# Altium PCB bootleg-3.PcbDoc (part 2 of 2)
Units mm, origin at the board's own origin, x right, y up, seen from the top; angles counter-clockwise.
Board outline 284.8 x 94.3 mm, 2 copper layers (Component Side, Bottom Layer), stack 1.571 mm thick; 153 components, 101 nets, 724 pads, 53 vias.
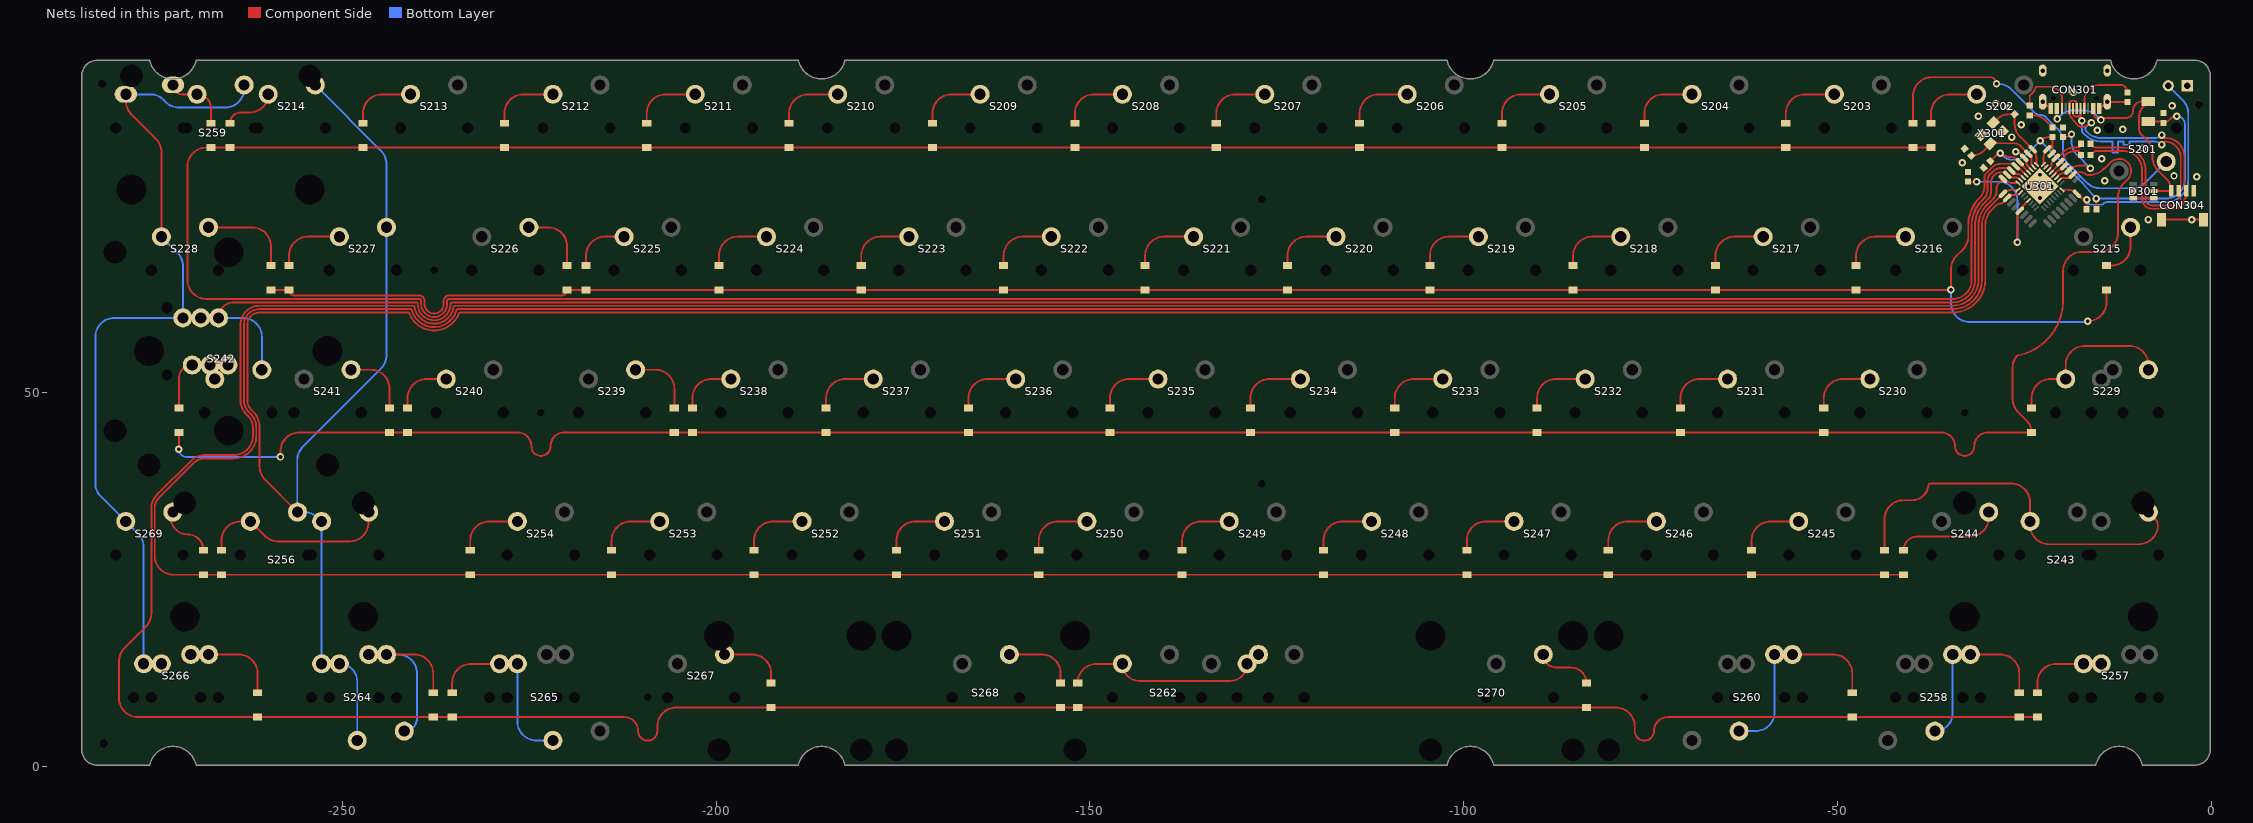
[diagram p2: the nets of this part, all layers, seen from the top]

## Via types
v1: diameter 1, hole 0.5, Component Side to Bottom Layer, tented both sides, 48 vias
v2: diameter 1, hole 0.5, Component Side to Bottom Layer, tented bottom, 5 vias

## Nets (pads, with @x,y where several pads share a name; then routed paths per layer and width w, separated by ;. In a path a pad name is that pad's centre, name@x,y a point inside that pad or via, vN(x,y) a via of type N, cw(c..) or ccw(c..) an arc to the next point about the centre after c; other vN are vias at no path point) (continued)
col14: S214.2 S227.2 S256.2 S264.2 U301.10 | length 379.4
  Component Side w0.254: -261.694,47.157 ccw(c-264.169,45.33) -261.996,47.507 -262.268,47.779 cw(c-261.112,48.931) -262.744,48.931 -262.744,59.09 cw(c-261.112,59.09) -262.432,60.05 cw(c-261.112,59.09) -261.112,60.722 -241.29,60.722 cw(c-241.289,60.468) -241.053,60.561 ccw(c-237.75,61.865) -240.674,59.85 ccw(c-237.75,61.865) -238.635,58.426 ccw(c-237.75,61.865) -235.455,59.155 ccw(c-237.75,61.865) -234.447,60.561 cw(c-234.211,60.467) -234.219,60.721 cw(c-234.172,59.309) -234.172,60.722 -34.563,60.722 ccw(c-34.563,65.078) -30.207,65.078 -30.207,72.357 cw(c-27.213,72.357) -29.331,74.473 -28.794,75.01 cw(c-28.067,74.282) -28.067,75.311 ccw(c-28.067,75.464) -27.959,75.356 -26.861,76.454 -26.035,76.454 ccw(c-26.035,77.021) -25.634,76.62 U301.10@-25.467,76.787 ; -261.694,47.156 cw(c-264.169,45.33) -261.093,45.33 -261.093,40.13 ccw(c-258.553,40.13) -260.349,38.334 S256.2@-256.03,34.015
  Bottom Layer w0.254: S214.2@-253.324,90.839 -244.869,82.384 cw(c-246.665,80.588) -244.125,80.588 S227.2@-244.125,72.115 -244.125,54.996 cw(c-246.665,54.996) -244.869,53.2 -255.313,42.756 ccw(c-253.517,40.96) -256.057,40.96 -256.057,34.015 S256.2@-256.03,34.015 -255.134,34.015 cw(c-255.134,31.475) -253.338,33.271 -252.832,32.765 -252.832,13.792 ccw(c-252.724,13.792) S264.2@-252.8,13.715 ; S264.2@-250.419,13.715 cw(c-250.419,11.334) -248.038,11.334 S264.2@-248.038,3.465
col15: S228.2 S242.1 S259.2 S266.2 S269.2 U301.7 | length 382.3
  Component Side w0.254: S259.2@-278.994,89.915 -278.994,89.038 ccw(c-276.454,89.038) -278.25,87.242 -274.981,83.973 cw(c-276.777,82.177) -274.237,82.177 S228.2@-274.237,70.865 ; S228.2@-274.266,70.807 S228.2@-273.627,71.445 ; S242.1@-266.599,59.995 cw(c-264.51,59.995) -264.51,62.084 -240.194,62.084 cw(c-240.193,61.83) -239.939,61.834 ccw(c-237.75,61.865) -235.561,61.834 cw(c-235.307,61.83) -235.306,62.084 -34.563,62.084 ccw(c-34.563,65.078) -31.569,65.078 -31.569,72.357 cw(c-27.213,72.357) -30.293,75.437 -29.802,75.928 ccw(c-30.709,76.835) -29.426,76.835 -29.426,78.129 cw(c-28.046,78.129) -29.023,79.104 ; -29.022,79.105 cw(c-28.085,78.167) -28.298,79.476 ; -28.298,79.493 U301.7@-27.642,79.493 ; U301.7@-27.362,79.248 U301.7@-27.27,79.156 -26.908,78.794 -26.162,78.794 cw(c-26.162,78.035) -25.625,78.572 U301.7@-25.467,78.413
  Bottom Layer w0.254: S269.2@-279.146,32.589 S269.2@-278.985,32.75 ; S259.2@-278.982,89.903 -278.994,89.891 S259.2@-278.994,89.915 -275.752,89.915 cw(c-275.752,87.375) -273.956,89.171 -273.667,88.882 ccw(c-271.871,90.678) -271.871,88.138 -265.709,88.138 ccw(c-265.709,90.678) -263.169,90.678 S259.2@-263.169,91.165 ; S266.2@-276.618,13.715 -276.618,29.331 ccw(c-279.158,29.331) -277.362,31.127 S269.2@-278.985,32.75 ; S228.2@-274.237,70.865 -272.105,68.733 cw(c-273.901,66.937) -271.361,66.937 S242.1@-271.361,59.995 -280.543,59.995 ccw(c-280.543,57.455) -283.083,57.455 -283.083,37.9 ccw(c-280.543,37.9) -282.339,36.104 S269.2@-279,32.765 S269.2@-278.985,32.75 ; S242.1@-266.599,59.995 -263.34,59.995 cw(c-263.34,57.455) -260.8,57.455 S242.1@-260.8,53.065
D_N: CON301.A7 CON301.B7 CON304.2 D301.4 R305.2 | length 50.7
  Component Side w0.254: CON301.A7@-18.45,88 cw(c-18.681,87.894) -18.427,87.894 -18.427,87.275 ccw(c-18.1,87.275) -18.1,86.948 -17.8,86.948 ccw(c-17.8,87.275) -17.473,87.275 -17.473,87.894 cw(c-17.219,87.894) CON301.B7@-17.45,88 -17.45,86.538 ccw(c-17.272,86.538) v1(-17.272,86.36) ; R305.2@-16.114,83.312 -15.732,82.93 ccw(c-15.367,83.294) -15.367,82.779 -11.76,82.779 cw(c-11.76,79.781) -8.763,79.781 -8.763,76.012 ; D301.4@-7.642,76.012 -8.763,76.012 ; v1(-6.604,83.185) -6.198,83.591 cw(c-6.198,81.438) -4.045,81.438 -4.045,77.682 cw(c-4.971,77.682) CON304.2@-4.316,77.027 -4.316,76.125 -4.045,75.854 -4.045,75.819 cw(c-4.807,75.819) -4.807,75.057 -7.874,75.057 cw(c-7.874,75.946) -8.763,75.946 -8.763,76.012
  Bottom Layer w0.254: v1(-17.272,86.36) -17.272,85.09 ccw(c-16.815,85.09) -17.138,84.767 -16.866,84.495 ccw(c-14.747,86.614) -14.747,83.617 -14.097,83.617 -13.208,83.617 -13.208,82.117 -12.446,82.117 -12.446,83.617 -11.684,83.617 -11.684,83.162 -10.922,83.162 -10.922,83.617 -9.017,83.617 -7.646,83.617 cw(c-7.646,82.143) -6.874,83.398 cw(c-7.646,82.143) v1(-6.604,83.185)
D_P: CON301.A6 CON301.B6 CON304.3 D301.3 R306.2 | length 50.7
  Component Side w0.254: CON301.A6@-17.95,88 cw(c-17.719,88.106) -17.973,88.106 -17.973,88.725 ccw(c-18.3,88.725) -18.3,89.052 -18.6,89.052 ccw(c-18.6,88.725) -18.927,88.725 -18.927,88.107 cw(c-19.181,88.106) CON301.B6@-18.95,88 -18.927,87.265 ccw(c-18.6,87.275) -18.899,87.143 -18.817,86.958 ccw(c-18.1,87.275) -18.699,86.769 -17.904,85.827 ccw(c-17.272,86.36) -17.111,85.549 ccw(c-17.272,86.36) -16.879,85.632 v1(-16.002,86.106) ; R306.2@-16.114,81.788 -15.732,82.17 cw(c-15.367,81.806) -15.367,82.321 -11.76,82.321 cw(c-11.76,79.781) -9.22,79.781 -9.22,76.012 ; D301.3@-10.392,76.012 -9.22,76.012 ; v1(-6.604,84.455) -6.198,84.049 -6.008,84.049 cw(c-6.008,81.628) -3.587,81.628 -3.587,77.682 ccw(c-2.661,77.682) CON304.3@-3.316,77.027 -3.316,76.125 -3.587,75.854 -3.587,75.819 cw(c-4.807,75.819) -4.807,74.6 -7.874,74.6 cw(c-7.874,75.946) -9.22,75.946 -9.22,76.012
  Bottom Layer w0.254: v1(-16.002,86.106) ccw(c-16.002,85.677) -16.305,85.98 -16.815,85.471 -16.815,85.09 -16.543,84.818 ccw(c-14.747,86.614) -14.747,84.074 -7.524,84.074 ccw(c-7.524,85.375) v1(-6.604,84.455)
D_PRE_N: R305.1 U301.30 | length 6.1
  Component Side w0.254: U301.30@-21.719,79.828 -21.553,79.994 ccw(c-22.077,80.518) -21.336,80.518 cw(c-20.541,80.518) -21.103,81.08 U301.30@-20.765,81.419 ccw(c-20.765,82.004) -20.351,81.59 -19.691,82.25 cw(c-18.415,80.974) -18.415,82.779 -17.768,82.779 ccw(c-17.768,83.005) -17.541,83.005 cw(c-17.107,83.005) R305.1@-17.414,83.312
D_PRE_P: R306.1 U301.29 | length 5.6
  Component Side w0.254: U301.29@-21.366,79.474 -20.349,80.491 ccw(c-20.711,80.853) U301.29@-20.199,80.853 -19.786,81.266 ccw(c-20.199,81.68) -19.614,81.68 -19.501,81.793 cw(c-18.226,80.517) -18.226,82.321 -17.768,82.321 cw(c-17.768,82.095) -17.541,82.095 ccw(c-17.107,82.095) R306.1@-17.414,81.788
GND: C301.1 C302.1 C303.1 C304.1 C305.1 C306.1 CON301.A1B12 CON301.B1A12 CON301.S1 CON302.1 CON304.4 CON304.5 D301.2 R302.2 R303.2 R304.2 U301.3 U301.28 X301.2 X301.4 | length 23.3
  Component Side w0.254: C302.1@-30.432,79.778 C302.1@-30.432,80.058 ; v1(-26.141,82.232) -25.812,82.164 cw(c-25.863,81.915) -25.684,82.095 U301.3@-25.007,81.419 -25.007,81.139 -24.671,81.139 -24.671,80.702 ccw(c-24.051,80.702) -24.49,80.264 ; -24.489,80.264 U301.3@-24.053,79.828 ; R303.2@-24.257,87.107 -23.882,87.107 cw(c-23.882,84.567) -22.086,86.363 C303.1@-21.209,85.486 ; v2(-22.886,77.6) -22.533,77.6 U301.28@-21.012,79.121 -19.845,80.287 U301.28@-19.633,80.287 ; CON301.S1@-22.52,88.915 CON301.B1A12@-21.45,88 ; CON301.A1B12@-14.95,88 CON301.S1@-13.88,88.915 ccw(c-13.85,88.915) -13.85,88.885 R304.2@-11.176,88.885 ; CON304.5@-6.616,73.152 CON304.5@-1.016,73.152
  Bottom Layer w0.254: CON301.S1@-22.52,89.915 CON301.S1@-22.398,89.793 ; CON301.S1@-13.88,89.793 CON301.S1@-13.88,89.915
  other v1: -8.382,73.152 -2.569,73.138 -2.54,75.057 -14.224,78.359 -1.905,78.867 -4.953,78.994 -33.274,80.772 -14.605,81.28 -9.144,82.677 -26.67,84.201 -15.24,85.09 -11.811,85.217 -25.4,85.852 -31.115,86.995 -5.207,88.392 -28.829,88.646 -18.415,90.17
  other v2: -22.886,76.045 -24.442,77.6 -21.33,77.6 -22.886,79.156
NetC301_2: C301.2 U301.27 | length 12.1
  Component Side w0.254: U301.27@-20.659,78.767 -20.276,79.15 cw(c-19.732,78.607) -19.732,79.375 -19.414,79.375 U301.27@-19.068,79.722 cw(c-17.452,78.105) -17.452,80.391 -17.049,80.391 cw(c-17.049,79.09) v1(-16.129,80.01) ; C301.2@-19.812,84.186 -19.498,84.186 ccw(c-19.498,85.538) v1@-18.542,84.582
  Bottom Layer w0.254: v1(-18.669,84.582) -18.669,83.602 ccw(c-16.129,83.602) -17.925,81.806 v1(-16.129,80.01)
NetC305_2: C305.2 U301.2 X301.3 | length 10.8
  Component Side w0.254: C305.2@-32.052,81.709 ccw(c-32.052,84.046) -30.4,82.394 -29.428,83.366 -26.437,83.366 cw(c-26.437,81.882) -25.388,82.931 U301.2@-24.442,81.984 -24.01,81.552 -24.01,80.492 U301.2@-23.699,80.181
NetC306_2: C306.2 U301.1 X301.1 | length 11
  Component Side w0.254: X301.1@-29.16,86.088 -28.743,86.505 cw(c-26.947,84.709) -26.947,87.249 C306.2@-26.289,87.249 -26.289,86.015 ccw(c-23.749,86.015) -25.545,84.219 U301.1@-23.876,82.55 cw(c-25.156,81.27) -23.346,81.27 U301.1@-23.346,80.535
NetCON301_A5: CON301.A5 R304.1 | length 8.6
  Component Side w0.254: CON301.A5@-16.95,88 -16.95,89.095 cw(c-14.859,89.095) -14.859,91.186 -12.177,91.186 cw(c-12.177,90.185) R304.1@-11.176,90.185
NetCON301_B5: CON301.B5 R303.1 | length 8.5
  Component Side w0.254: R303.1@-24.257,88.407 -24.257,89.639 cw(c-24.003,89.639) -24.147,89.848 ccw(c-25.05,91.165) -23.523,90.697 ccw(c-25.05,91.165) -23.509,90.746 cw(c-23.264,90.679) -23.288,90.932 -21.601,90.932 cw(c-21.601,89.281) -19.95,89.281 CON301.B5@-19.95,88
NetD201_1: D201.1 S201.1 | length 48.7
  Component Side w0.254: D201.1@-39.878,86.05 -39.878,89.662 cw(c-37.338,89.662) -37.338,92.202 -29.591,92.202 cw(c-29.591,91.313) v1(-28.702,91.313)
  Bottom Layer w0.254: v1(-28.702,91.313) -28.509,91.313 cw(c-28.509,88.773) -26.713,90.569 -23.642,87.499 ccw(c-22.733,88.408) -22.733,87.122 cw(c-22.733,86.202) -22.083,86.853 -20.556,85.326 cw(c-22.352,83.53) -19.812,83.53 -19.812,82.339 ccw(c-17.272,82.339) -19.068,80.543 -16.612,78.087 ccw(c-14.816,79.883) -14.816,77.343 -10.624,77.343 ccw(c-10.624,79.883) -8.828,78.087 S201.1@-6,80.915 S201.1@-6.679,80.915
NetD202_1: D202.1 S202.1 | length 8.9
  Component Side w0.254: D202.1@-37.465,86.05 -37.465,87.375 cw(c-34.925,87.375) -34.925,89.915 S202.1@-31.35,89.915
NetD203_1: D203.1 S203.1 | length 9.3
  Component Side w0.254: D203.1@-56.896,86.05 -56.896,87.375 cw(c-54.356,87.375) -54.356,89.915 S203.1@-50.4,89.915
NetD204_1: D204.1 S204.1 | length 9.1
  Component Side w0.254: D204.1@-75.819,86.05 -75.819,87.375 cw(c-73.279,87.375) -73.279,89.915 S204.1@-69.45,89.915
NetD205_1: D205.1 S205.1 | length 9.1
  Component Side w0.254: D205.1@-94.869,86.05 -94.869,87.375 cw(c-92.329,87.375) -92.329,89.915 S205.1@-88.5,89.915
NetD206_1: D206.1 S206.1 | length 9.1
  Component Side w0.254: D206.1@-113.919,86.05 -113.919,87.375 cw(c-111.379,87.375) -111.379,89.915 S206.1@-107.55,89.915
NetD207_1: D207.1 S207.1 | length 9.3
  Component Side w0.254: D207.1@-133.096,86.05 -133.096,87.375 cw(c-130.556,87.375) -130.556,89.915 S207.1@-126.6,89.915
NetD208_1: D208.1 S208.1 | length 9.1
  Component Side w0.254: D208.1@-152.019,86.05 -152.019,87.375 cw(c-149.479,87.375) -149.479,89.915 S208.1@-145.65,89.915
NetD209_1: D209.1 S209.1 | length 9.1
  Component Side w0.254: D209.1@-171.069,86.05 -171.069,87.375 cw(c-168.529,87.375) -168.529,89.915 S209.1@-164.7,89.915
NetD210_1: D210.1 S210.1 | length 9.3
  Component Side w0.254: D210.1@-190.246,86.05 -190.246,87.375 cw(c-187.706,87.375) -187.706,89.915 S210.1@-183.75,89.915
NetD211_1: D211.1 S211.1 | length 9.3
  Component Side w0.254: D211.1@-209.296,86.05 -209.296,87.375 cw(c-206.756,87.375) -206.756,89.915 S211.1@-202.8,89.915
NetD212_1: D212.1 S212.1 | length 9.3
  Component Side w0.254: D212.1@-228.346,86.05 -228.346,87.375 cw(c-225.806,87.375) -225.806,89.915 S212.1@-221.85,89.915
NetD213_1: D213.1 S213.1 | length 9.1
  Component Side w0.254: D213.1@-247.269,86.05 -247.269,87.375 cw(c-244.729,87.375) -244.729,89.915 S213.1@-240.9,89.915
NetD214_1: D214.1 S214.1 | length 7.3
  Component Side w0.254: D214.1@-265.049,86.05 cw(c-263.596,86.05) -263.596,87.503 -262.362,87.503 ccw(c-262.362,89.915) S214.1@-259.95,89.915
NetD215_1: D215.1 S215.1 | length 7.2
  Component Side w0.254: D215.1@-13.97,67 -13.303,67 ccw(c-13.303,69.54) -10.763,69.54 S215.1@-10.763,72.115
NetD216_1: D216.1 S216.1 | length 10
  Component Side w0.254: D216.1@-47.498,67 -47.498,68.325 cw(c-44.958,68.325) -44.958,70.865 S216.1@-40.875,70.865 ; S216.1@-40.875,71.445 S216.1@-40.265,71.445
NetD217_1: D217.1 S217.1 | length 9.8
  Component Side w0.254: D217.1@-66.294,67 -66.294,68.325 cw(c-63.754,68.325) -63.754,70.865 S217.1@-59.925,70.865 ; S217.1@-59.925,71.445 S217.1@-59.315,71.445
NetD218_1: D218.1 S218.1 | length 9.8
  Component Side w0.254: D218.1@-85.344,67 -85.344,68.325 cw(c-82.804,68.325) -82.804,70.865 S218.1@-78.975,70.865 ; S218.1@-78.975,71.445 S218.1@-78.365,71.445
NetD219_1: D219.1 S219.1 | length 9.9
  Component Side w0.254: D219.1@-104.521,67 -104.521,68.325 cw(c-101.981,68.325) -101.981,70.865 S219.1@-98.025,70.865 ; S219.1@-98.025,71.445 S219.1@-97.415,71.445
NetD220_1: D220.1 S220.1 | length 9.3
  Component Side w0.254: D220.1@-123.571,67 -123.571,68.325 cw(c-121.031,68.325) -121.031,70.865 S220.1@-117.075,70.865
NetD221_1: D221.1 S221.1 | length 9.9
  Component Side w0.254: D221.1@-142.621,67 -142.621,68.325 cw(c-140.081,68.325) -140.081,70.865 S221.1@-136.125,70.865 ; S221.1@-136.125,71.445 S221.1@-135.515,71.445
NetD222_1: D222.1 S222.1 | length 9.1
  Component Side w0.254: D222.1@-161.544,67 -161.544,68.325 cw(c-159.004,68.325) -159.004,70.865 S222.1@-155.175,70.865
NetD223_1: D223.1 S223.1 | length 9.1
  Component Side w0.254: D223.1@-180.594,67 -180.594,68.325 cw(c-178.054,68.325) -178.054,70.865 S223.1@-174.225,70.865
NetD224_1: D224.1 S224.1 | length 9.1
  Component Side w0.254: D224.1@-199.644,67 -199.644,68.325 cw(c-197.104,68.325) -197.104,70.865 S224.1@-193.275,70.865
NetD225_1: D225.1 S225.1 | length 7.9
  Component Side w0.254: D225.1@-217.424,67 -217.424,68.325 cw(c-214.884,68.325) -214.884,70.865 S225.1@-212.325,70.865
NetD226_1: D226.1 S226.1 | length 9.1
  Component Side w0.254: S226.1@-225.075,72.115 -222.504,72.115 cw(c-222.504,69.575) -219.964,69.575 D226.1@-219.964,67
NetD227_1: D227.1 S227.1 | length 9.5
  Component Side w0.254: D227.1@-257.175,67 -257.175,68.325 cw(c-254.635,68.325) -254.635,70.865 S227.1@-250.425,70.865
NetD228_1: D228.1 S228.1 | length 12.4
  Component Side w0.254: S228.1@-267.938,72.115 -262.128,72.115 cw(c-262.128,69.575) -259.588,69.575 D228.1@-259.588,67
NetD229_1: D229.1 S229.1 | length 28.2
  Component Side w0.254: D229.1@-24.003,47.95 -24.003,49.275 ; S229.1@-19.444,51.815 S229.1@-20.153,51.815 ; S229.1@-8.381,53.065 -8.381,53.721 ccw(c-10.921,53.721) -10.921,56.261 -16.904,56.261 ccw(c-16.904,53.721) -19.444,53.721 -19.444,52.395 -19.573,52.395 S229.1@-20.153,51.815 ; -24.003,49.275 cw(c-21.463,49.275) -21.463,51.815 ; -24.003,49.275 cw(c-21.463,49.275) -21.463,51.815 ; -21.463,51.815 S229.1@-20.153,51.815
NetD230_1: D230.1 S230.1 | length 9
  Component Side w0.254: D230.1@-51.816,47.95 -51.816,49.275 cw(c-49.276,49.275) -49.276,51.815 S230.1@-45.637,51.815
NetD231_1: D231.1 S231.1 | length 9.1
  Component Side w0.254: D231.1@-70.993,47.95 -70.993,49.275 cw(c-68.453,49.275) -68.453,51.815 S231.1@-64.687,51.815
NetD232_1: D232.1 S232.1 | length 9.2
  Component Side w0.254: D232.1@-90.17,47.95 -90.17,49.275 cw(c-87.63,49.275) -87.63,51.815 S232.1@-83.737,51.815
NetD233_1: D233.1 S233.1 | length 9.2
  Component Side w0.254: D233.1@-109.22,47.95 -109.22,49.275 cw(c-106.68,49.275) -106.68,51.815 S233.1@-102.787,51.815
NetD234_1: D234.1 S234.1 | length 10.3
  Component Side w0.254: D234.1@-128.524,47.95 -128.524,49.275 cw(c-125.984,49.275) -125.984,51.815 S234.1@-121.837,51.815
  Bottom Layer w0.254: S234.1@-121.793,51.83 S234.1@-121.227,52.395
NetD235_1: D235.1 S235.1 | length 9.2
  Component Side w0.254: D235.1@-147.32,47.95 -147.32,49.275 cw(c-144.78,49.275) -144.78,51.815 S235.1@-140.887,51.815
NetD236_1: D236.1 S236.1 | length 9.1
  Component Side w0.254: D236.1@-166.243,47.95 -166.243,49.275 cw(c-163.703,49.275) -163.703,51.815 S236.1@-159.937,51.815
NetD237_1: D237.1 S237.1 | length 9.1
  Component Side w0.254: D237.1@-185.293,47.95 -185.293,49.275 cw(c-182.753,49.275) -182.753,51.815 S237.1@-178.987,51.815
NetD238_1: D238.1 S238.1 | length 7.9
  Component Side w0.254: D238.1@-203.2,47.95 -203.2,49.275 cw(c-200.66,49.275) -200.66,51.815 S238.1@-198.037,51.815
NetD239_1: D239.1 S239.1 | length 9.2
  Component Side w0.254: S239.1@-210.788,53.065 -208.153,53.065 cw(c-208.153,50.525) -205.613,50.525 D239.1@-205.613,47.95
NetD240_1: D240.1 S240.1 | length 7.9
  Component Side w0.254: D240.1@-241.3,47.95 -241.3,49.275 cw(c-238.76,49.275) -238.76,51.815 S240.1@-236.137,51.815
NetD241_1: D241.1 S241.1 | length 9.2
  Component Side w0.254: S241.1@-248.862,53.065 -246.253,53.065 cw(c-246.253,50.525) -243.713,50.525 D241.1@-243.713,47.95
NetD242_1: D242.1 S242.2 | length 6.8
  Component Side w0.254: D242.1@-271.907,47.95 -271.907,51.899 cw(c-270.111,51.899) S242.2@-270.111,53.695
NetD243_1: D243.1 S243.1 | length 52.7
  Component Side w0.254: D243.1@-43.688,28.9 -43.688,33.061 cw(c-41.148,33.061) -41.148,35.601 -40,35.601 ccw(c-40,37.79) -37.82,37.595 cw(c-37.567,37.573) -37.566,37.827 -34.414,37.827 cw(c-34.163,36.195) -34.163,37.846 -26.746,37.846 cw(c-26.746,35.306) -24.206,35.306 S243.1@-24.206,32.765 -24.206,32.258 ccw(c-21.666,32.258) -21.666,29.718 -9.652,29.718 ccw(c-9.652,32.258) -7.112,32.258 ccw(c-8.253,32.258) -8.253,33.399 S243.1@-8.381,33.399
NetD244_1: D244.1 S244.1 | length 14.2
  Component Side w0.254: D244.1@-41.148,28.9 cw(c-39.314,28.9) -41.051,29.49 cw(c-39.314,28.9) -39.314,30.734 -32.283,30.734 ccw(c-32.283,33.274) -29.743,33.274 S244.1@-29.743,33.528
NetD245_1: D245.1 S245.1 | length 9.1
  Component Side w0.254: D245.1@-61.468,28.9 -61.468,30.225 cw(c-58.928,30.225) -58.928,32.765 S245.1@-55.162,32.765
NetD246_1: D246.1 S246.1 | length 9.3
  Component Side w0.254: D246.1@-80.645,28.9 -80.645,30.225 cw(c-78.105,30.225) -78.105,32.765 S246.1@-74.212,32.765 ; S246.1@-74.295,32.652 S246.1@-74.197,32.75
NetD247_1: D247.1 S247.1 | length 9.1
  Component Side w0.254: D247.1@-99.568,28.9 -99.568,30.225 cw(c-97.028,30.225) -97.028,32.765 S247.1@-93.262,32.765
NetD248_1: D248.1 S248.1 | length 9.2
  Component Side w0.254: D248.1@-118.745,28.9 -118.745,30.225 cw(c-116.205,30.225) -116.205,32.765 S248.1@-112.312,32.765
NetD249_1: D249.1 S249.1 | length 9.1
  Component Side w0.254: D249.1@-137.668,28.9 -137.668,30.225 cw(c-135.128,30.225) -135.128,32.765 S249.1@-131.362,32.765
NetD250_1: D250.1 S250.1 | length 9.2
  Component Side w0.254: D250.1@-156.845,28.9 -156.845,30.225 cw(c-154.305,30.225) -154.305,32.765 S250.1@-150.412,32.765
NetD251_1: D251.1 S251.1 | length 9.2
  Component Side w0.254: D251.1@-175.895,28.9 -175.895,30.225 cw(c-173.355,30.225) -173.355,32.765 S251.1@-169.462,32.765
NetD252_1: D252.1 S252.1 | length 9.2
  Component Side w0.254: D252.1@-194.945,28.9 -194.945,30.225 cw(c-192.405,30.225) -192.405,32.765 S252.1@-188.512,32.765
NetD253_1: D253.1 S253.1 | length 9.2
  Component Side w0.254: D253.1@-213.995,28.9 -213.995,30.225 cw(c-211.455,30.225) -211.455,32.765 S253.1@-207.562,32.765
NetD254_1: D254.1 S254.1 | length 9.1
  Component Side w0.254: D254.1@-232.918,28.9 -232.918,30.225 cw(c-230.378,30.225) -230.378,32.765 S254.1@-226.612,32.765
NetD256_1: D256.1 S256.1 | length 25.6
  Component Side w0.254: D256.1@-266.192,28.9 -266.192,30.225 cw(c-263.652,30.225) -263.652,32.765 -262.357,32.765 -262.115,32.523 -260.435,30.843 ccw(c-258.639,32.639) -258.639,30.099 -249.072,30.099 ccw(c-249.072,32.639) -246.532,32.639 S256.1@-246.532,33.399
NetD257_1: D257.1 S257.2 | length 9
  Component Side w0.254: D257.1@-23.241,9.85 -23.241,11.175 cw(c-20.701,11.175) -20.701,13.715 S257.2@-17.062,13.715
NetD258_1: D258.1 S258.1 | length 22.2
  Component Side w0.254: S258.1@-32.188,14.965 -28.194,14.965 cw(c-28.194,12.425) -25.654,12.425 D258.1@-25.654,9.85
  Bottom Layer w0.254: S258.1@-36.95,4.715 ccw(c-36.95,7.096) -34.569,7.096 S258.1@-34.569,14.965
NetD259_1: D259.1 S259.1 | length 8.9
  Component Side w0.254: S259.1@-272.694,91.165 ccw(c-271.444,91.165) -271.444,89.915 S259.1@-269.469,89.915 cw(c-269.469,88.035) -267.589,88.035 D259.1@-267.589,86.05
NetD260_1: D260.1 S260.1 | length 28.5
  Component Side w0.254: S260.1@-58.526,14.965 S260.1@-58.387,14.965 S260.1@-56.006,14.965 -50.546,14.965 cw(c-50.546,12.425) -48.006,12.425 D260.1@-48.006,9.85
  Bottom Layer w0.254: S260.1@-63.15,4.715 -60.927,4.715 ccw(c-60.927,7.255) -58.387,7.255 S260.1@-58.387,14.965
NetD262_1: D262.1 S262.2 | length 26.8
  Component Side w0.254: D262.1@-151.638,11.135 -151.638,11.175 cw(c-149.098,11.175) -149.098,13.715 S262.2@-145.649,13.715 ccw(c-143.364,13.715) -143.364,11.43 -131.258,11.43 ccw(c-131.258,13.715) S262.2@-128.973,13.715
NetD264_1: D264.1 S264.1 | length 24.5
  Component Side w0.254: S264.1@-244.119,14.965 -240.411,14.965 cw(c-240.411,12.425) -237.871,12.425 D264.1@-237.871,9.85
  Bottom Layer w0.254: S264.1@-244.119,14.965 -242.57,14.965 cw(c-242.57,12.425) -240.03,12.425 -240.03,6.423 cw(c-241.738,6.423) S264.1@-241.738,4.715
NetD265_1: D265.1 S265.2 | length 23
  Component Side w0.254: D265.1@-235.331,9.85 -235.331,11.175 cw(c-232.791,11.175) -232.791,13.715 S265.2@-228.993,13.715
  Bottom Layer w0.254: S265.2@-226.612,13.715 -226.612,6.005 ccw(c-224.072,6.005) -224.072,3.465 S265.2@-221.849,3.465
NetD266_1: D266.1 S266.1 | length 10.6
  Component Side w0.254: S266.1@-267.937,14.965 -263.906,14.965 cw(c-263.906,12.425) -261.366,12.425 D266.1@-261.366,9.85
NetD267_1: D267.1 S267.1 | length 9
  Component Side w0.254: S267.1@-198.881,14.965 -195.199,14.965 cw(c-195.199,12.425) -192.659,12.425 D267.1@-192.659,11.145
NetD268_1: D268.1 S268.1 | length 13.6
  Component Side w0.254: S268.1@-160.781,14.965 -156.464,14.965 ; D268.1@-153.924,11.135 -153.924,12.425 ; -156.464,14.965 cw(c-156.464,12.425) -153.924,12.425 ; -156.464,14.965 cw(c-156.464,12.425) -153.924,12.425
NetD269_1: D269.1 S269.1 | length 7.6
  Component Side w0.254: S269.1@-272.996,34.015 -272.996,33.306 ccw(c-270.721,33.306) -270.721,31.031 cw(c-270.721,28.915) D269.1@-268.605,28.915
NetD270_1: D270.1 S270.1 | length 8.2
  Component Side w0.254: S270.1@-89.343,14.732 S270.1@-89.343,14.965 ccw(c-87.586,14.965) -87.586,13.208 -85.639,13.208 cw(c-85.639,11.135) D270.1@-83.566,11.135
NetR302_1: R302.1 U301.13 | length 19.7
  Component Side w0.254: R302.1@-32.512,78.217 v1(-31.369,78.217) v1@-31.369,78.232 ; v1@-25.781,70.373 -25.91,70.373 -25.91,74.011 U301.13@-25.573,74.348 -25.573,74.503 -24.892,75.184 -24.892,75.241 U301.13@-24.406,75.726
  Bottom Layer w0.254: v1(-31.369,78.217) -28.448,78.217 cw(c-28.448,75.677) -25.908,75.677 v1(-25.908,70.104)
PC2: D215.2 D216.2 D217.2 D218.2 D219.2 D220.2 D221.2 D222.2 D223.2 D224.2 D225.2 D226.2 D227.2 D228.2 U301.5 | length 278.9
  Component Side w0.254: D228.2@-259.588,63.73 D227.2@-257.175,63.73 ccw(c-256.437,63.73) -256.437,62.992 -239.739,62.992 cw(c-239.739,62.284) -239.631,62.984 cw(c-239.739,62.284) -239.031,62.284 -239.031,61.865 ccw(c-237.75,61.865) -236.469,61.865 -236.469,62.284 cw(c-235.761,62.284) -235.761,62.992 -220.702,62.992 ccw(c-220.702,63.73) D226.2@-219.964,63.73 D225.2@-217.424,63.73 D224.2@-199.644,63.73 D223.2@-180.594,63.73 D222.2@-161.544,63.73 D221.2@-142.621,63.73 D220.2@-123.571,63.73 D219.2@-104.521,63.73 D218.2@-85.344,63.73 D217.2@-66.294,63.73 D216.2@-47.498,63.73 -34.822,63.73 ccw(c-34.822,63.754) v1(-34.798,63.754) -34.798,66.512 cw(c-32.258,66.512) -34.054,68.308 -33.221,69.141 ccw(c-35.017,70.937) -32.477,70.937 -32.477,72.386 cw(c-27.284,72.386) -30.956,76.058 ccw(c-32.457,77.559) -30.334,77.559 -30.334,78.665 cw(c-29.303,78.665) -30.032,79.394 -29.337,80.09 cw(c-28.046,78.799) -29.336,80.09 cw(c-28.046,78.799) -28.046,80.624 U301.5@-26.419,80.624 ; U301.5@-26.139,80.287 -25.927,80.287 U301.5@-24.76,79.121 ; v1(-16.51,59.563) ccw(c-16.51,62.103) -13.97,62.103 D215.2@-13.97,63.73
  Bottom Layer w0.254: v1(-34.798,63.754) -34.798,61.976 ccw(c-32.258,61.976) -32.258,59.436 -16.637,59.436 v1(-16.51,59.563)
PC4: D229.2 D230.2 D231.2 D232.2 D233.2 D234.2 D235.2 D236.2 D237.2 D238.2 D239.2 D240.2 D241.2 D242.2 U301.26 | length 317
  Component Side w0.254: v1(-271.907,42.418) D242.2@-271.907,44.68 ; v1(-258.318,41.402) -258.318,42.14 cw(c-255.778,42.14) -255.778,44.68 D241.2@-243.713,44.68 D240.2@-241.3,44.68 -241.3,44.45 cw(c-241.07,44.45) -241.07,44.68 -226.608,44.68 cw(c-226.608,42.815) -224.743,42.815 ccw(c-223.462,42.815) -222.181,42.815 cw(c-220.316,42.815) -220.316,44.68 D239.2@-205.613,44.68 D238.2@-203.2,44.68 D237.2@-185.293,44.68 D236.2@-166.243,44.68 D235.2@-147.32,44.68 D234.2@-128.524,44.68 D233.2@-109.22,44.68 D232.2@-90.17,44.68 D231.2@-70.993,44.68 D230.2@-51.816,44.68 -36.108,44.68 cw(c-36.108,42.815) -34.243,42.815 ccw(c-32.962,42.815) -31.681,42.815 cw(c-29.816,42.815) -29.816,44.68 D229.2@-24.003,44.68 ccw(c-26.207,44.68) -24.649,46.239 -25.799,47.389 cw(c-24.003,49.185) -26.543,49.185 -26.543,53.34 cw(c-24.003,53.34) -26.035,54.864 cw(c-25.832,54.711) -25.881,54.96 ccw(c-27.327,62.354) -23.683,55.76 ccw(c-27.327,62.354) -20.669,58.828 cw(c-20.444,58.71) -20.574,58.928 -20.574,58.955 cw(c-20.32,58.955) -20.549,59.066 ccw(c-27.327,62.354) -19.884,61.185 ccw(c-27.327,62.354) -19.793,62.354 -19.793,63.219 cw(c-19.539,63.219) -19.779,63.301 -19.779,66.327 cw(c-17.272,66.327) -17.272,68.834 -14.986,68.834 ccw(c-14.986,71.374) -12.446,71.374 -12.446,76.208 cw(c-9.906,76.208) -11.702,78.004 -11.094,78.613 ccw(c-12.036,79.556) -10.703,79.556 -10.703,79.756 ccw(c-12.08,79.756) -11.106,80.73 -11.276,80.899 ccw(c-12.152,80.023) -12.152,81.262 -12.319,81.262 ccw(c-12.319,79.711) -13.415,80.808 ; U301.26@-20.305,78.413 -19.979,78.74 -18.918,78.74 U301.26@-18.502,79.156 cw(c-18.165,79.156) -18.165,79.493 -17.534,79.493 cw(c-17.534,78.224) -16.859,79.298 ccw(c-16.431,79.726) -16.711,79.19 ccw(c-16.431,79.726) -16.431,79.121 -16.236,79.121 ccw(c-16.236,81.63) -14.461,79.856 ccw(c-15.744,81.938) -14.015,80.208 ; -14.015,80.209 -13.416,80.808
  Bottom Layer w0.254: v1(-271.907,42.418) ccw(c-270.891,42.418) -270.891,41.402 v1(-258.318,41.402)
PD0: D201.2 D202.2 D203.2 D204.2 D205.2 D206.2 D207.2 D208.2 D209.2 D210.2 D211.2 D212.2 D213.2 D214.2 D259.2 U301.6 | length 514.7
  Component Side w0.254: D202.2@-37.465,82.78 D201.2@-39.878,82.78 D203.2@-56.896,82.78 D204.2@-75.819,82.78 D205.2@-94.869,82.78 D206.2@-113.919,82.78 D207.2@-133.096,82.78 D208.2@-152.019,82.78 D209.2@-171.069,82.78 D210.2@-190.246,82.78 D211.2@-209.296,82.78 D212.2@-228.346,82.78 D213.2@-247.269,82.78 D214.2@-265.049,82.78 D259.2@-267.589,82.78 -268.224,82.78 ccw(c-268.224,80.24) -270.764,80.24 -270.764,65.088 ccw(c-268.224,65.088) -268.224,62.548 -260.598,62.548 ccw(c-260.368,65.078) -260.368,62.538 -239.739,62.538 cw(c-239.739,62.284) -239.485,62.284 -239.485,61.865 ccw(c-237.75,61.865) -236.015,61.865 -236.015,62.284 cw(c-235.761,62.284) -235.761,62.538 -34.563,62.538 ccw(c-34.563,65.078) -32.023,65.078 -32.023,72.357 cw(c-27.213,72.357) -30.616,75.757 cw(c-27.213,72.357) -30.614,75.758 -30.353,76.019 ccw(c-31.505,77.171) -29.88,77.051 -29.88,78.528 cw(c-28.972,78.528) -29.614,79.17 -29.599,79.17 -29.14,79.629 cw(c-28.103,78.592) -28.103,80.058 -27.041,80.058 U301.6@-26.704,79.722 -26.231,79.248 -25.913,79.248 cw(c-25.913,78.48) -25.369,79.023 U301.6@-25.113,78.767
PD2: D257.2 D258.2 D260.2 D262.2 D264.2 D265.2 D266.2 D267.2 D268.2 D270.2 U301.8 | length 583.8
  Component Side w0.254: -279.908,8.89 ccw(c-278.583,8.89) -279.778,8.317 ; U301.8@-25.821,78.06 -26.555,78.06 cw(c-26.555,79.871) U301.8@-27.836,78.59 -28.433,77.993 ccw(c-27.782,77.343) -28.702,77.343 -28.702,77.01 cw(c-30.208,77.01) -28.704,76.93 cw(c-30.208,77.01) -29.143,75.945 -29.972,75.116 ccw(c-27.213,72.357) -29.973,75.115 ccw(c-27.213,72.357) -31.115,72.357 -31.115,65.078 cw(c-34.563,65.078) -34.563,61.63 -234.893,61.63 ccw(c-234.895,61.376) -235.145,61.419 cw(c-237.75,61.865) -240.355,61.419 ccw(c-240.605,61.376) -240.607,61.63 -261.112,61.63 ccw(c-261.112,59.09) -263.652,59.09 -263.652,48.931 ccw(c-261.112,48.931) -262.908,47.135 -262.636,46.863 cw(c-264.169,45.33) -262.001,45.33 -262.001,44.196 cw(c-264.541,44.196) -264.541,41.656 -268.442,41.656 ccw(c-268.442,39.116) -270.238,40.912 -274.846,36.304 ccw(c-273.05,34.508) -275.59,34.508 -275.59,20.483 cw(c-278.13,20.483) -276.334,18.687 -279.164,15.857 ccw(c-277.368,14.061) -279.908,14.061 -279.908,9.12 ccw(c-277.368,9.12) -279.778,8.317 ; D257.2@-23.241,6.58 D260.2@-48.006,6.58 -72.673,6.58 ccw(c-72.673,4.715) -74.538,4.715 cw(c-75.819,4.715) -77.1,4.715 -77.1,5.325 ccw(c-79.64,5.325) -79.64,7.865 D270.2@-83.566,7.865 -83.566,7.875 D267.2@-192.659,7.875 -205.348,7.875 ccw(c-205.348,5.335) -207.888,5.335 -207.888,4.715 cw(c-209.169,4.715) -210.45,4.715 ccw(c-212.315,4.715) -212.315,6.58 D265.2@-235.331,6.58 D266.2@-261.366,6.58 -277.368,6.58 cw(c-277.368,9.12) -279.778,8.317
PD3: D243.2 D244.2 D245.2 D246.2 D247.2 D248.2 D249.2 D250.2 D251.2 D252.2 D253.2 D254.2 D256.2 D269.2 U301.9 | length 527.9
  Component Side w0.254: D244.2@-41.656,25.63 D245.2@-61.468,25.63 D246.2@-80.645,25.63 D247.2@-99.568,25.63 D248.2@-118.745,25.63 D249.2@-137.668,25.63 D250.2@-156.845,25.63 D251.2@-175.895,25.63 D252.2@-194.945,25.63 D253.2@-213.995,25.63 D254.2@-232.918,25.63 D256.2@-266.192,25.63 D269.2@-268.605,25.63 -272.596,25.63 cw(c-272.596,28.17) -275.136,28.17 -275.136,34.508 cw(c-273.05,34.508) -274.526,35.982 -274.126,36.382 -269.917,40.591 cw(c-268.442,39.116) -268.981,41.131 cw(c-268.442,39.116) -268.442,41.202 -264.541,41.202 ccw(c-264.541,44.196) -263.506,41.387 ccw(c-264.541,44.196) -262.361,42.144 ccw(c-264.541,44.196) -261.547,44.196 -261.547,45.33 ccw(c-264.169,45.33) -261.989,46.787 ccw(c-264.169,45.33) -262.316,47.185 -262.589,47.458 cw(c-261.112,48.931) -263.069,48.208 cw(c-261.112,48.931) -263.198,48.931 -263.198,59.09 cw(c-261.112,59.09) -263.159,59.491 cw(c-261.112,59.09) -261.112,61.176 -241.008,61.176 cw(c-241.008,59.563) -240.957,61.175 cw(c-240.965,60.921) -240.722,60.993 ccw(c-237.75,61.865) -239.551,59.345 ccw(c-237.75,61.865) -235.643,59.596 ccw(c-237.75,61.865) -234.778,60.993 cw(c-234.534,60.922) -234.533,61.176 -34.563,61.176 ccw(c-34.563,65.078) -30.661,65.078 -30.661,72.357 cw(c-27.213,72.357) -29.651,74.795 U301.9@-27.836,76.61 ; U301.9@-27.836,76.61 cw(c-26.555,75.33) -26.555,77.141 U301.9@-25.821,77.141
RAW: CON301.A4B9 CON301.B4A9 CON304.1 D301.5 F301.2 | length 34.5
  Component Side w0.254: CON301.B4A9@-20.65,88 -20.65,86.797 ccw(c-20.391,86.797) v1(-20.574,86.614) ; CON301.A4B9@-15.75,88 -15.75,87.505 ccw(c-14.732,87.505) v1(-14.732,86.487) cw(c-14.478,86.487) -14.478,86.741 -11.43,86.741 ccw(c-11.43,87.757) -10.414,87.757 cw(c-9.191,87.757) -9.191,88.98 F301.2@-8.382,88.98 -8.967,88.395 ccw(c-7.313,86.741) -9.652,86.741 -9.652,85.344 ccw(c-8.426,85.344) -9.293,84.477 -8.561,83.745 cw(c-10.357,81.949) -7.817,81.949 -7.817,81.513 ccw(c-5.277,81.513) -7.073,79.717 -5.969,78.613 cw(c-7.545,77.037) -5.316,77.037 CON304.1@-5.316,77.027 cw(c-5.473,77.184) -5.473,76.962 D301.5@-7.642,76.962
  Bottom Layer w0.254: v1@-20.701,86.995 -20.574,86.868 v1(-20.574,86.614) -20.06,87.128 cw(c-18.542,85.611) -18.542,87.757 -17.054,87.757 cw(c-17.054,85.217) -15.258,87.013 v1(-14.732,86.487)
RST: CON302.2 R301.2 U301.24 | length 34.3
  Component Side w0.254: U301.24@-19.952,77.141 -19.217,77.141 cw(c-19.217,75.33) U301.24@-17.936,76.61 ; U301.24@-17.936,76.61 -17.504,76.178 ccw(c-16.637,77.045) v1(-16.637,75.819) -16.637,74.585 cw(c-16.688,74.585) R301.2@-16.652,74.549
  Bottom Layer w0.254: v1(-16.637,75.819) ccw(c-15.952,75.819) -15.952,75.134 -14.778,75.134 ccw(c-14.778,75.738) -14.351,75.311 cw(c-13.878,74.838) -13.878,75.507 -6.042,75.507 ccw(c-6.042,78.501) -3.048,78.501 -3.048,87.34 ccw(c-5.588,87.34) -3.792,89.136 CON302.2@-5.715,91.059
VCC: C302.2 C303.2 C304.2 F301.1 R301.1 U301.4 U301.31 U301.32 | length 59.2
  Component Side w0.254: C302.2@-29.512,80.978 -28.628,81.862 cw(c-28.194,81.429) v1(-28.194,82.042) ; v1@-27.901,81.939 ccw(c-26.924,82.915) -26.924,81.534 cw(c-26.924,79.917) -25.78,81.06 U301.4@-25.573,80.853 -25.573,80.706 -25.019,80.152 -25.019,80.087 U301.4@-24.406,79.474 ; v1(-22.86,83.693) cw(c-21.67,82.503) -21.67,84.186 C303.2@-21.209,84.186 -21.209,83.237 ; U301.31@-22.073,80.181 U301.32@-22.426,80.535 -22.426,81.27 cw(c-20.616,81.27) U301.32@-21.896,82.55 ; U301.32@-21.896,82.55 -21.209,83.237 ; U301.31@-21.33,81.984 -21.209,82.106 -21.209,83.237 ; R301.1@-15.352,74.549 v1(-15.352,75.961) ; F301.1@-8.382,86.28 -6.806,86.28 cw(c-6.806,85.635) C304.2@-6.35,86.091 ccw(c-6.35,86.975) -5.725,86.35 -5.403,86.672 cw(c-4.624,85.894) -4.624,86.995 v1(-4.572,86.995)
  Bottom Layer w0.254: v1(-28.194,82.042) -27.844,81.692 ccw(c-26.543,82.993) -26.543,81.153 -26.452,81.153 ccw(c-26.452,83.693) -24.656,81.897 v1(-22.86,83.693) -17.083,77.916 v1(-15.352,75.961) -6.042,75.961 ccw(c-6.042,78.501) -3.502,78.501 -3.502,85.925 ccw(c-4.572,85.925) -4.299,86.96 ccw(c-4.572,85.925) v1(-4.572,86.995)
pads on no net: CON301. CON301.A8 CON301.B8 D301.1 D301.6 S201. S202. S203. S204. S205. S206. S207. S208. S209. S210. S211. S212. S213. S214. S215. S216. S217. S218. S219. S220. S221. S222. S223. S224. S225. S226. S227. S228. S229. S230. S231. S232. S233. S234. S235. S236. S237. S238. S239. S240. S241. S242. S243. S244. S245. S246. S247. S248. S249. S250. S251. S252. S253. S254. S256. S257. S258. S259. S260. S262. S264. S265. S266. S267. S268. S269. S270.
copper on no net: | length 125.5
  Component Side w0.254: -142.621,17.018 -142.621,23.876 -118.11,23.876 -118.11,17.018 -142.621,17.018
  Bottom Layer w0.254: -142.621,17.018 -142.621,23.876 -118.11,23.876 -118.11,17.018 -142.621,17.018

## Polygon pours and split planes (outlines as drawn)
GND on Bottom Layer "Bottom Layer-GND" (hatched 45Degree grid 0.508 track 0.203, remove dead copper, pour order 0): -33.882,81.153 ccw(c-30.716,81.153) -32.955,78.914 -29.925,75.884 ccw(c-27.686,78.123) -27.686,74.957 -10.033,74.957 cw(c-10.033,73.787) -8.863,73.787 -8.863,73.025 ccw(c-7.493,73.025) -7.493,71.655 -1.778,71.655 ccw(c-1.778,73.025) -0.408,73.025 -0.408,89.662 ccw(c-1.778,89.662) -1.778,91.032 -11.684,91.032 cw(c-11.684,92.075) -12.727,92.075 -12.727,93.472 ccw(c-13.462,93.472) -13.462,94.207 -22.86,94.207 ccw(c-22.86,93.472) -23.595,93.472 -23.595,90.424 cw(c-24.765,90.424) -24.765,89.254 -28.702,89.254 ccw(c-28.702,86.088) -30.941,88.327 -32.955,86.313 ccw(c-30.716,84.074) -33.882,84.074
GND on Component Side "Component Side-GND" (hatched 45Degree grid 0.508 track 0.203, remove dead copper, pour order 1): -33.882,81.153 ccw(c-30.716,81.153) -32.955,78.914 -29.925,75.884 ccw(c-27.686,78.123) -27.686,74.957 -10.033,74.957 cw(c-10.033,73.787) -8.863,73.787 -8.863,73.025 ccw(c-7.493,73.025) -7.493,71.655 -1.778,71.655 ccw(c-1.778,73.025) -0.408,73.025 -0.408,89.662 ccw(c-1.778,89.662) -1.778,91.032 -11.684,91.032 cw(c-11.684,92.075) -12.727,92.075 -12.727,93.472 ccw(c-13.462,93.472) -13.462,94.207 -22.86,94.207 ccw(c-22.86,93.472) -23.595,93.472 -23.595,90.424 cw(c-24.765,90.424) -24.765,89.254 -28.702,89.254 ccw(c-28.702,86.088) -30.941,88.327 -32.955,86.313 ccw(c-30.716,84.074) -33.882,84.074

## Other copper
Component Side:
  pour cut-out: -13.837,94.342 ccw(c-10.3,95.149) -6.754,94.388 ccw(c-6.878,94.415) -6.751,94.415 ccw(c-6.878,94.415) -6.878,94.542 -13.668,94.542 ccw(c-13.668,94.415) -13.777,94.48 ccw(c-13.713,94.37)
  text "BOOTLEG-3" at -141.097,19.939 h5
  text "Rev B1" at -140.97,17.78 h2
  text "by 4pplet" at -128.524,17.78 h2
Bottom Layer:
  pour cut-out: -13.837,94.342 ccw(c-10.3,95.149) -6.754,94.388 ccw(c-6.878,94.415) -6.751,94.415 ccw(c-6.878,94.415) -6.878,94.542 -13.668,94.542 ccw(c-13.668,94.415) -13.777,94.48 ccw(c-13.713,94.37)
  text "BOOTLEG-3" at -119.888,19.939 h5
  text "Rev B1" at -135.763,17.78 h2
  text "by 4pplet" at -119.761,17.78 h2

## Silkscreen, mask and mechanical layers (free items; w line width, h text height)
Top Overlay:
  text "RESET" at -6.731,92.583 h2
outline:
  lines w0.1: -284.861,36.576 -280.67,36.576 ccw(c-280.67,37.719) -279.527,37.719 -279.527,37.795 ccw(c-280.797,37.795) -280.797,39.065 -284.85,39.065 -284.85,92.415 cw(c-282.85,92.415) -282.85,94.415 -275.85,94.415 ccw(c-272.7,95.149) -269.55,94.415 -189.05,94.415 ccw(c-185.9,95.149) -182.75,94.415 -102.25,94.415 ccw(c-99.1,95.149) -95.95,94.415 -23.553,94.415 ; -284.85,36.565 -284.85,2.215 ccw(c-282.85,2.215) -282.85,0.215 -275.85,0.215 cw(c-272.7,-0.52) -269.55,0.215 -189.05,0.215 cw(c-185.9,-0.52) -182.75,0.215 -102.25,0.215 cw(c-99.1,-0.52) -95.95,0.215 -15.45,0.215 cw(c-12.3,-0.52) -9.15,0.215 -2.15,0.215 ccw(c-2.15,2.215) -0.15,2.215 -0.15,36.576 -0.762,36.576 -4.191,36.576 cw(c-4.191,37.846) -5.461,37.846 cw(c-4.242,37.846) -4.242,39.065 -0.15,39.065 -0.15,92.415 ccw(c-2.15,92.415) -2.15,94.415 -7.15,94.415 ; -24.208,94.415 -13.477,94.415 ccw(c-10.327,95.149) -7.177,94.415
Mechanical 2:
  lines w0.2: -22.479,94.107 -14.732,94.107 ; -14.097,94.107 -13.462,94.107 cw(c-13.462,93.472) -12.827,93.472 -12.827,92.075 ccw(c-11.684,92.075) -11.684,90.932 -11.303,90.932 -1.778,90.932 cw(c-1.778,89.662) -0.508,89.662 -0.508,73.025 cw(c-1.778,73.025) -1.778,71.755 -7.493,71.755 cw(c-7.493,73.025) -8.763,73.025 -8.763,73.787 ccw(c-10.033,73.787) -10.033,75.057 -27.686,75.057 cw(c-27.686,78.123) -29.854,75.955 -32.884,78.985 cw(c-30.716,81.153) -33.782,81.153 -33.782,84.074 cw(c-30.716,84.074) -32.884,86.242 -31.242,87.884 -30.87,88.256 cw(c-28.702,86.088) -28.702,89.154 -24.765,89.154 ccw(c-24.765,90.424) -23.495,90.424 -23.495,93.472 cw(c-22.86,93.472) -22.86,94.107 -13.843,94.107
Mechanical 16:
  drawing of 561 lines, arcs and shapes, not listed

## Dimensions
-0.15,92.415 to -284.85,92.415 on top dimensions
-9.15,0.215 to -7.177,94.415 on top dimensions
-0.15,92.415 to -284.85,92.415 on bot dimensions
-9.15,0.215 to -2.15,94.415 on bot dimensions

## Text inside footprints (layer, text, board x,y; h text height)
CON301: Mechanical 15 "connector edge" at -15.25,95.25 h1 r180
S262: Mechanical 16 "6.25U" at -188.764,5.615 h1.52 r270; Mechanical 16 "7U" at -208.331,7.365 h1.52 r270